# Altium PCB DelayedTimeRelay.PcbDoc
Units mil, origin at the board's own origin, x right, y up, seen from the top; angles counter-clockwise.
Board outline 6724.61 x 5284.47 mil, 2 copper layers (Top Layer, Top, Bottom Layer, Bottom); 17 components, 14 nets, 53 pads, 0 vias.
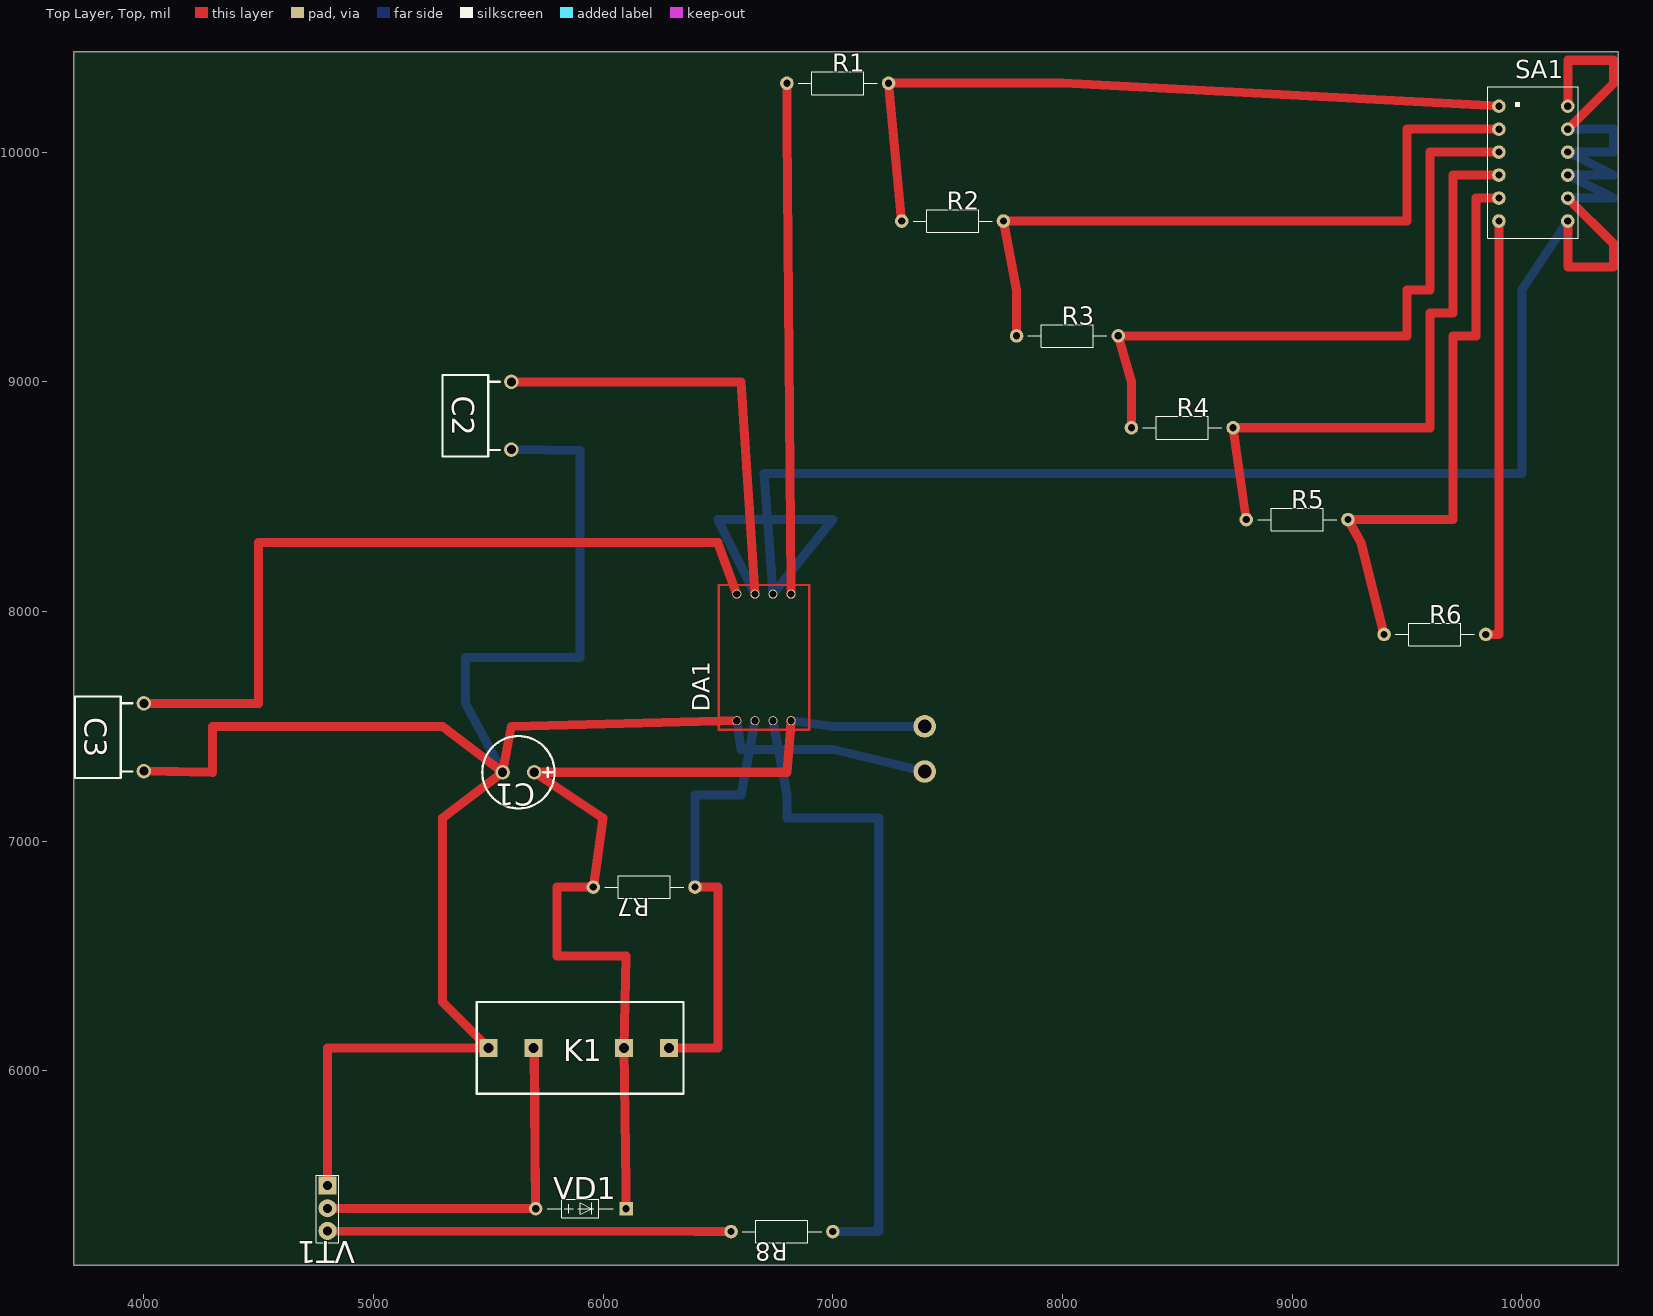
[diagram p0: Top Layer, Top view]
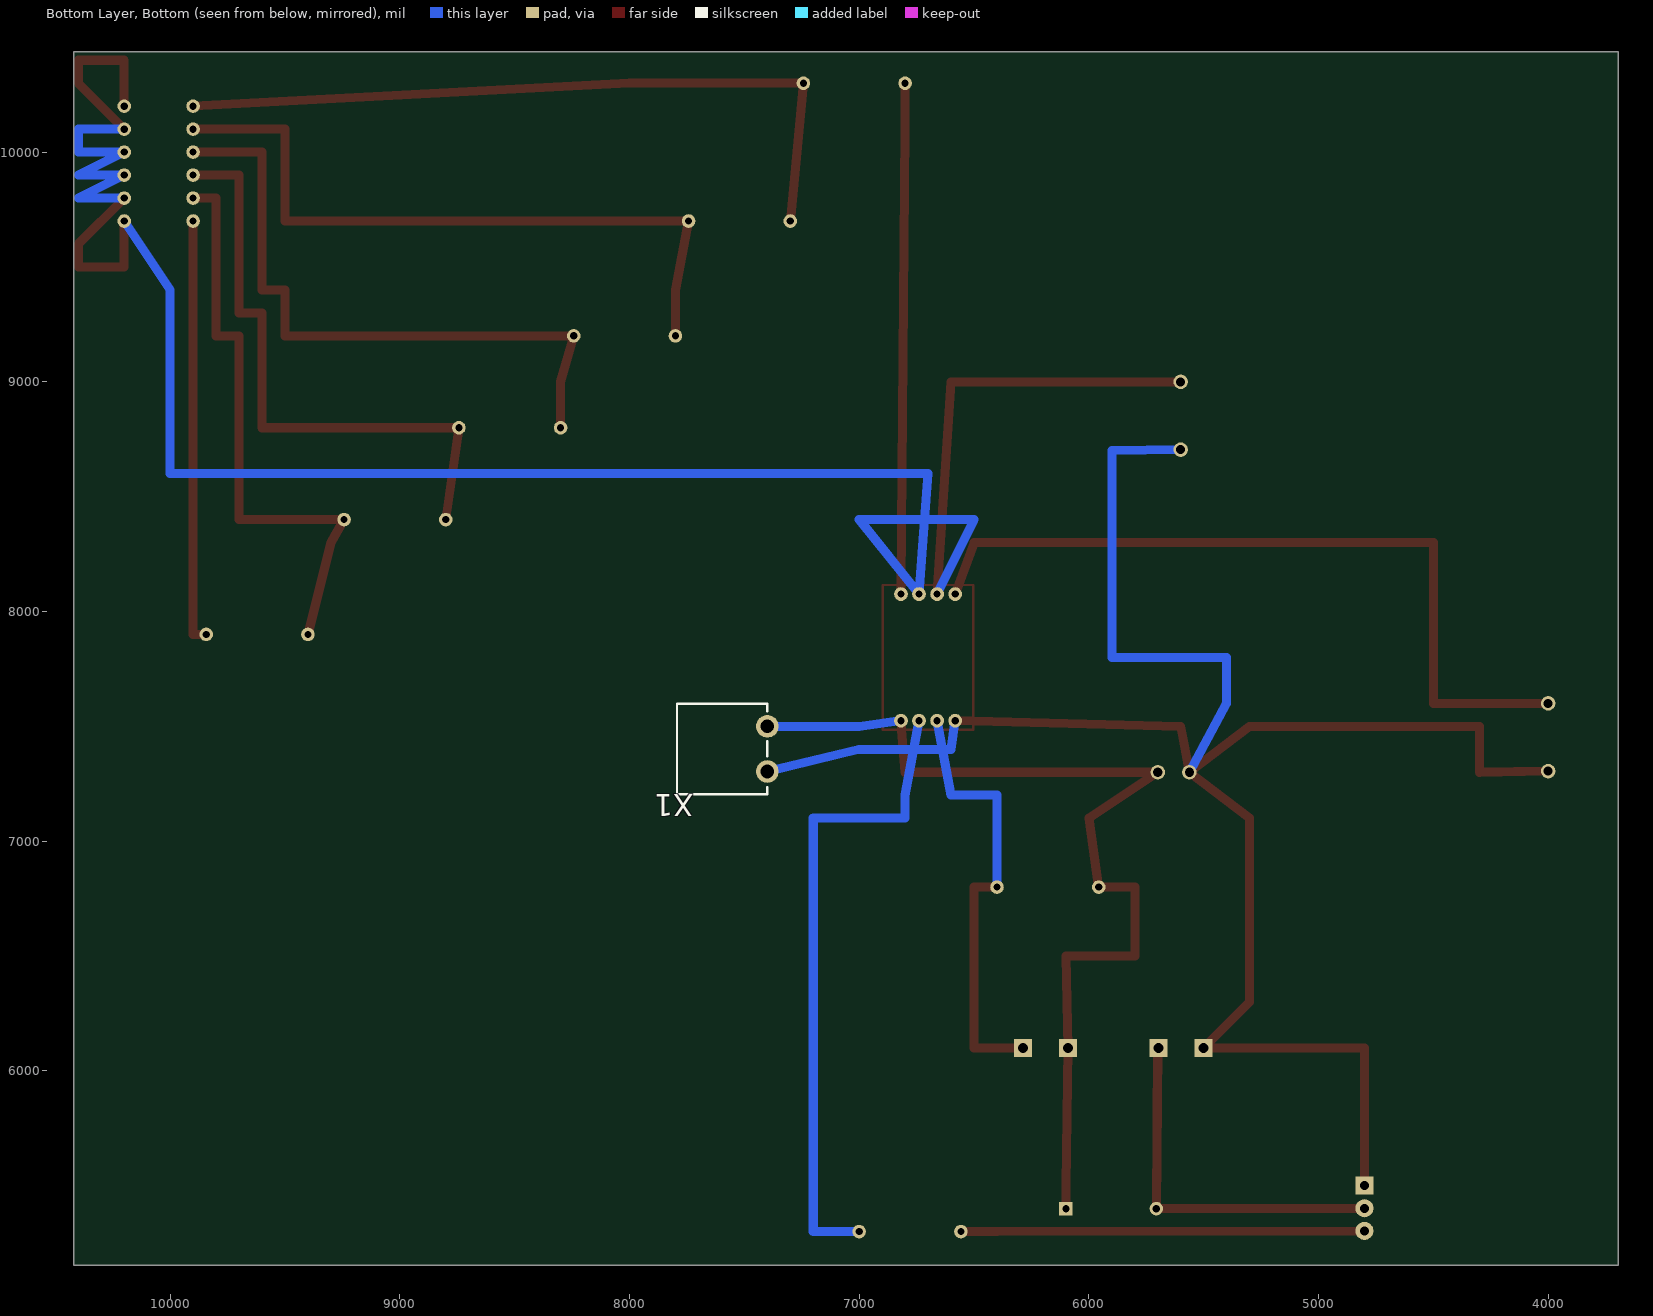
[diagram p1: Bottom Layer, Bottom view, seen from below]

## Layer stack, top to bottom
Top Solder, Top Mask: solder mask 0.4, Solder Resist, Dk 3.5
Top Layer, Top: signal copper 1.4
Dielectric 1: dielectric 12.6, FR-4, Dk 4.8
Bottom Layer, Bottom: signal copper 1.4
Bottom Solder, Bot Mask: solder mask 0.4, Solder Resist, Dk 3.5

## Board outline
3695.08,5152.52 10419.68,5152.52 10419.68,10436.98 3695.08,10436.98

## Design rules (kind name [scope] priority, off if disabled: settings)
Clearance [All] p1: gap=10 ignorepadtopadclearanceinfootprint=FALSE except(0: Arc-Hole Track-Hole SMDPad-Hole THPad-Hole Via-Hole Fill-Hole Poly-Hole Region-Hole Text-Hole; 11.81: Arc-Arc Arc-Track Arc-THPad Arc-Via Track-Track Track-THPad Track-Via THPad-THPad THPad-Via Via-Via)
PlaneClearance [All] p1: clearance=10
PolygonConnect [All] p1: connectstyle=Relief reliefconductorwidth=10 reliefentries=4 polygonreliefangle="90 Angle" airgapwidth=10
RoutingVias [All] p1: holewidth=28 width=50 viastyle="Through Hole" minholewidth=28 minwidth=50 maxholewidth=28 maxwidth=50
SolderMaskExpansion [All] p1: expansion=4
Width [All] p1: maxlimit=10 minlimit=10 preferedwidth=10
29 further rules are at their usual default settings.

## Components (designator, comment, footprint, x,y, rotation, side; value= is the part's Value field where it differs from the comment)
C1 "100mk" ECR-8 5700,7300 r180 top
C2 "33mk" 1017-B3R 5600,9000 r270 top
C3 "0,1" 1017-B3R 4000,7600 r270 top
DA1 "" LMC555CN 6700,7800 r90 top
K1 "K1" RELE6 5500,6100 r0 top
R1 "" C2-33H-0.125W 6800,10300 r0 top
R2 "" C2-33H-0.125W 7300,9700 r0 top
R3 "" C2-33H-0.125W 7800,9200 r0 top
R4 "" C2-33H-0.125W 8300,8800 r0 top
R5 "" C2-33H-0.125W 8800,8400 r0 top
R6 "" C2-33H-0.125W 9400,7900 r0 top
R7 "" C2-33H-0.125W 6400,6800 r180 top
R8 "" C2-33H-0.125W 7000,5300 r180 top
SA1 "" DS1040-6 9900,10200 r0 top
VD1 "KD522A" КД521(522)_КД522А(Primary) 6100,5400 r0 top
VT1 "KT315B" KT13_КТ315В(Primary) 4800,5500 r180 top
X1 "" 2XR 7400,7500 r0 bottom

## Footprints (in the part's own frame and the unit in brackets; to place one, negate y for a bottom-side part, rotate by r counter-clockwise, add the part's x,y. Pads: shape width x height; smd on the part's side, far side on the other; paste and mask are expansions set on the pad)
2XR [mm]
  round 2.5 hole 1.5: 1(0,0) 2(0,5)
  silkscreen extent 0,-2.5 10,7.5
1017-B3R [mm]
  round 1.6 hole 1: 1(0,0) 2(7.5,0)
  silkscreen extent -0.76,-7.61 8.26,-1.25
C2-33H-0.125W [mm]
  round 1.5 hole 0.8: 1(0,0) 2(11.25,0)
  silkscreen extent 1.25,-1.25 10,1.25
DS1040-6 [mm]
  round 1.5 hole 0.8: 1(0,0) 2(0,-2.54) 3(0,-5.08) 4(0,-7.62) 5(0,-10.16) 6(0,-12.7) 7(7.62,-12.7) 8(7.62,-10.16) 9(7.62,-7.62) 10(7.62,-5.08) 11(7.62,-2.54) 12(7.62,0)
  silkscreen extent -1.21,-14.58 8.79,2.17
ECR-8 [mm]
  round 1.6 hole 1: 1(0,0) 2(3.5,0)
  silkscreen extent -2.25,-4 5.75,4
KT13_КТ315В(Primary) [mm]
  rect 2x2 hole 1: 1(0,0)
  round 2 hole 1: 2(0,5) 3(0,2.5)
  silkscreen extent -1.25,-1.17 1.25,6.33
LMC555CN [mm]
  round 1 / inner round 1 / far side round 1.524 hole 0.8: 1(-7,3) 2(-7,1) 3(-7,-1) 4(-7,-3) 5(7,3) 6(7,1) 7(7,-1) 8(7,-3)
RELE6 [mm]
  rect 2x2 hole 1.1: 1(5,0) 2(15,0) 3(0,0) 4(20,0)
  silkscreen extent -1.27,-5.08 21.59,5.08
КД521(522)_КД522А(Primary) [mm]
  round 1.5 hole 0.8: 1(-10,0)
  rect 1.5x1.5 hole 0.8: 2(0,0)
  silkscreen extent -8.71,-1.02 -1.4,1.02

## Nets (pads, with @x,y where several pads share a name; then routed paths per layer and width w, separated by ;. In a path a pad name is that pad's centre, name@x,y a point inside that pad or via, vN(x,y) a via of type N, cw(c..) or ccw(c..) an arc to the next point about the centre after c; other vN are vias at no path point)
NET00002: R1.2 R2.1 SA1.1 | length 3262.4
  Top Layer, Top w39.37: R2.1 R1.2 8000,10300 SA1.1
NET00003: R2.2 R3.1 SA1.2 | length 3062.5
  Top Layer, Top w39.37: R3.1 7800,9400 R2.2 9500,9700 9500,10100 SA1.2
NET00004: R3.2 R4.1 SA1.3 | length 2865.1
  Top Layer, Top w39.37: R4.1 8300,9000 R3.2 9500,9200 9500,9400 9600,9400 9600,10000 SA1.3
NET00005: R4.2 R5.1 SA1.4 | length 2661.1
  Top Layer, Top w39.37: R5.1 R4.2 9600,8800 9600,9300 9700,9300 9700,9900 SA1.4
NET00006: R5.2 R6.1 SA1.5 | length 2584.5
  Top Layer, Top w39.37: R6.1 9300,8300 R5.2 9700,8400 9700,9200 9800,9200 9800,9800 SA1.5
NET00007: R6.2 SA1.6 | length 1857.1
  Top Layer, Top w39.37: R6.2 9900,7900 SA1.6
NET00009: DA1.2 K1.4 R7.1 | length 1942.6
  Top Layer, Top w39.37: K1.4 6500,6100 6500,6800 R7.1
  Bottom Layer, Bottom w39.37: R7.1 6400,7200 6600,7200 DA1.2
NET00010: K1.1 VD1.1 VT1.3 | length 1609.5
  Top Layer, Top w39.37: VT1.3 5700,5400 VD1.1 5700,6100 K1.1
NET00011: R8.2 VT1.2 | length 1757.1
  Top Layer, Top w39.37: VT1.2 6400,5300 R8.2
NET00012: C1.1 DA1.4 DA1.8 K1.2 R1.1 R7.2 VD1.2 X1.1 | length 8701.3
  Top Layer, Top w10: 6503.15,7485.04 6814.93,7485.04 6896.85,7485.04 6896.85,8114.96 6817.76,8114.96 6503.15,8114.96 6503.15,7485.04
  Top Layer, Top w39.37: VD1.2 6100,5500 K1.2 6100,6500 5800,6500 5800,6800 R7.2 6000,7100 C1.1 6800,7300 6814.93,7485.04 DA1.4 ; R1.1 6800,10100 6817.76,8114.96 DA1.8
  Bottom Layer, Bottom w39.37: DA1.4 7000,7500 X1.1
NET00013: DA1.3 R8.1 | length 2830
  Bottom Layer, Bottom w39.37: DA1.3 6800,7200 6800,7100 7200,7100 7200,5300 R8.1
NET00014: C3.1 DA1.5 | length 3438.9
  Top Layer, Top w39.37: C3.1 4500,7600 4500,8300 6500,8300 DA1.5
NET00015: C2.1 DA1.6 DA1.7 SA1.7 SA1.8 SA1.9 SA1.10 SA1.11 SA1.12 | length 11103.9
  Top Layer, Top w39.37: C2.1 6600,9000 DA1.6 ; SA1.7 10200,9500 10400,9500 10400,9600 SA1.8 ; SA1.11 10400,10300 10400,10400 10200,10400 SA1.12
  Bottom Layer, Bottom w39.37: DA1.6 6500,8400 6715.02,8400 ; SA1.7 10000,9400 10000,8600 6700,8600 6715.02,8400 ; SA1.8 10400,9800 SA1.9 10400,9900 SA1.10 10400,10000 10400,10100 SA1.11 ; 6715.02,8400 7000,8400 DA1.7 6715.02,8400
NET00016: C1.2 C2.2 C3.2 DA1.1 K1.3 VT1.1 X1.2 | length 8906.5
  Top Layer, Top w39.37: C3.2 4300,7300 4300,7500 5300,7500 C1.2 ; VT1.1 4800,6100 K1.3 5300,6300 5300,7100 C1.2 ; DA1.1 5600,7500 C1.2
  Bottom Layer, Bottom w39.37: C1.2 5400,7600 5400,7800 5900,7800 5900,8700 C2.2 ; DA1.1 6600,7400 7000,7400 X1.2

## Text inside footprints (layer, text, board x,y; h text height)
VT1: Mechanical 1, Top Assy "Б" at 4888.58,5319.69 h125 r180; Mechanical 1, Top Assy "К" at 4888.58,5418.11 h125 r180; Mechanical 1, Top Assy "Э" at 4888.58,5526.38 h125 r180